# Altium PCB robotShield.PcbDoc
Units mil, origin at the board's own origin, x right, y up, seen from the top; angles counter-clockwise.
Board outline 3149.61 x 2362.2 mil, 2 copper layers (Top Layer, Bottom Layer); 66 components, 44 nets, 260 pads, 37 vias.
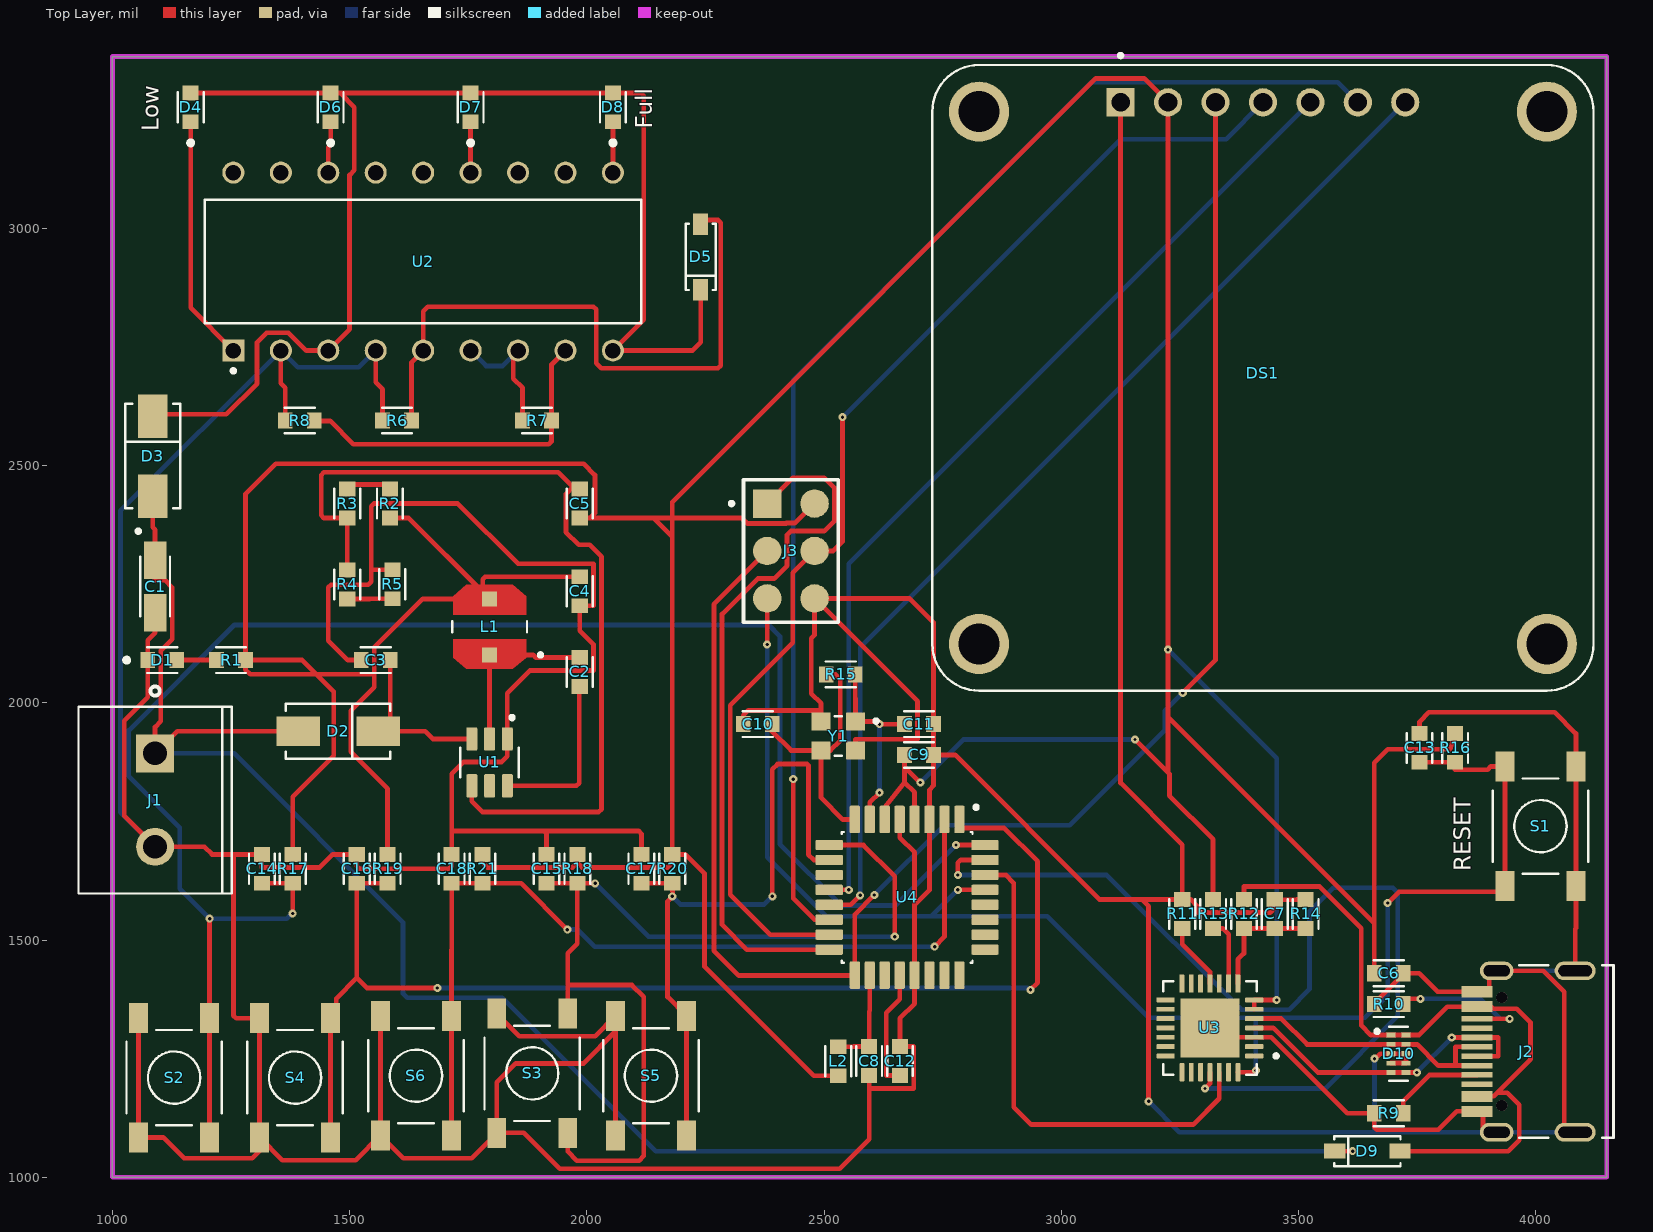
[diagram p0: Top Layer view]
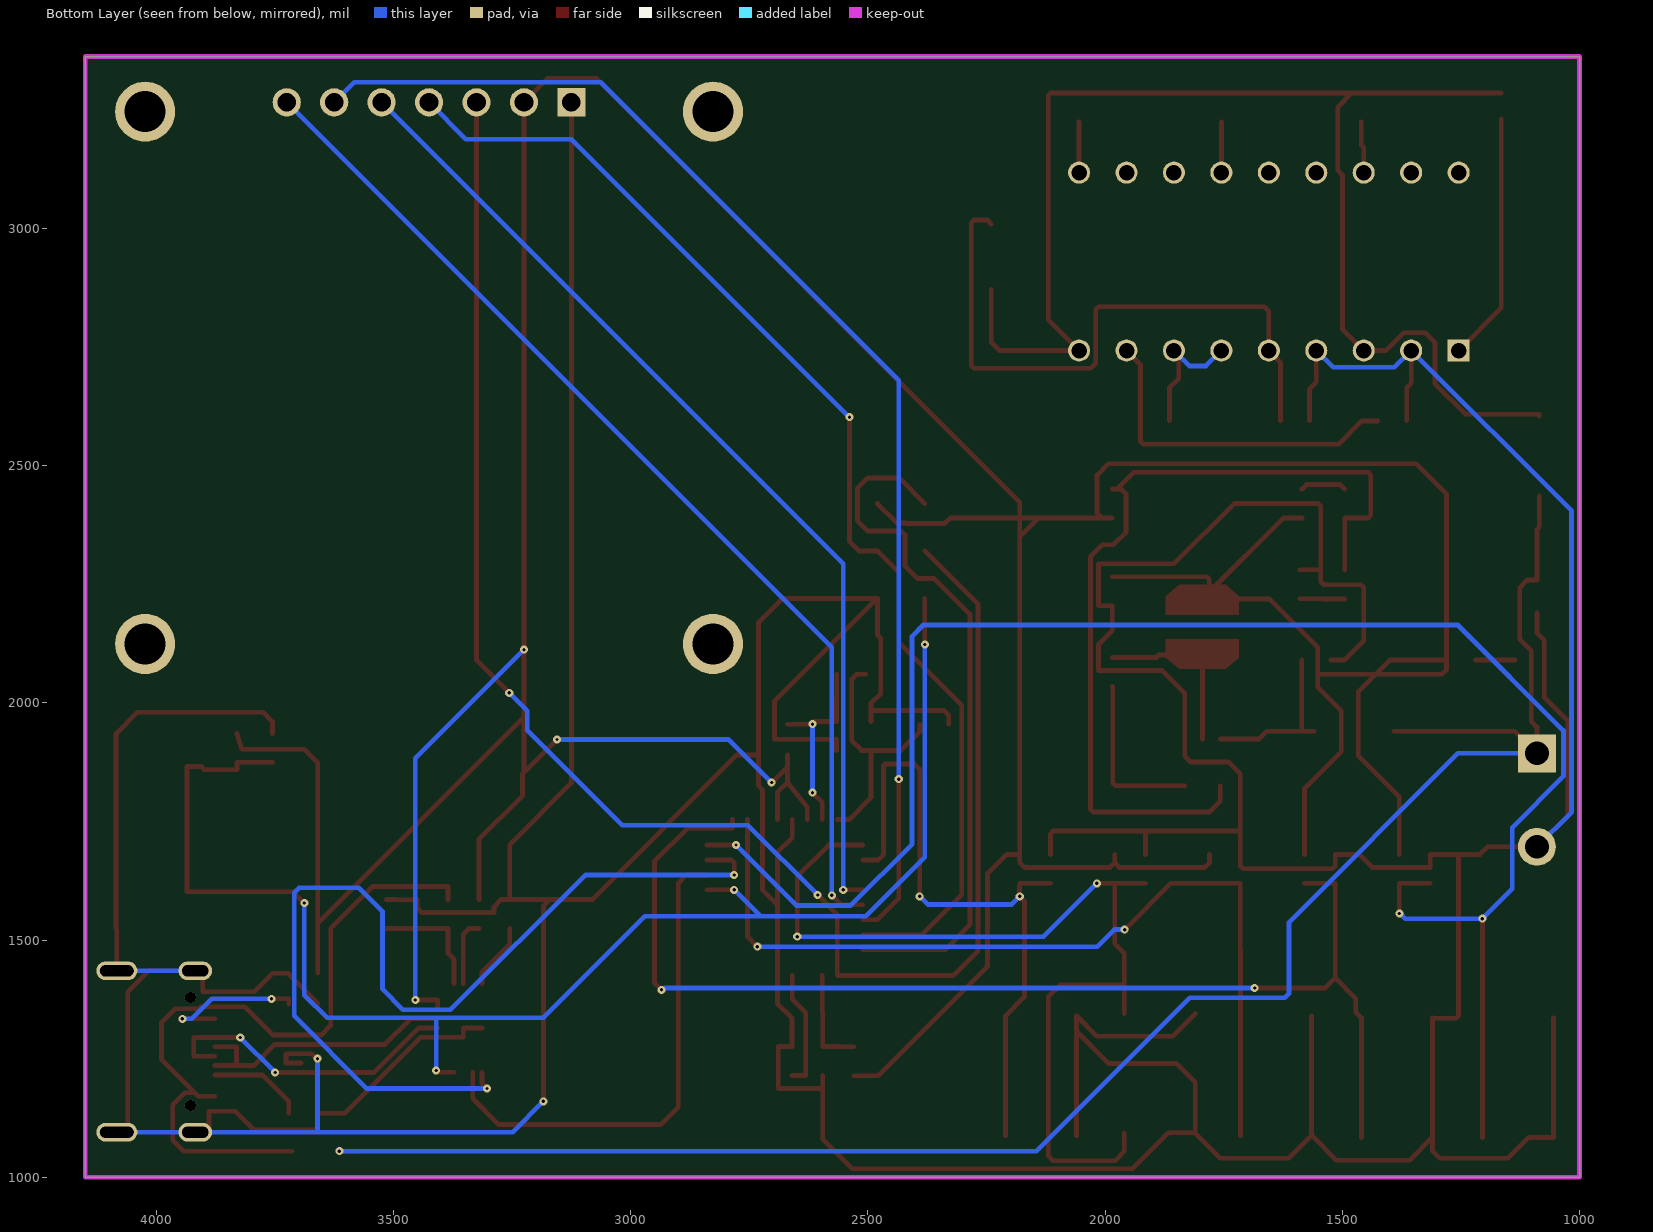
[diagram p1: Bottom Layer view, seen from below]
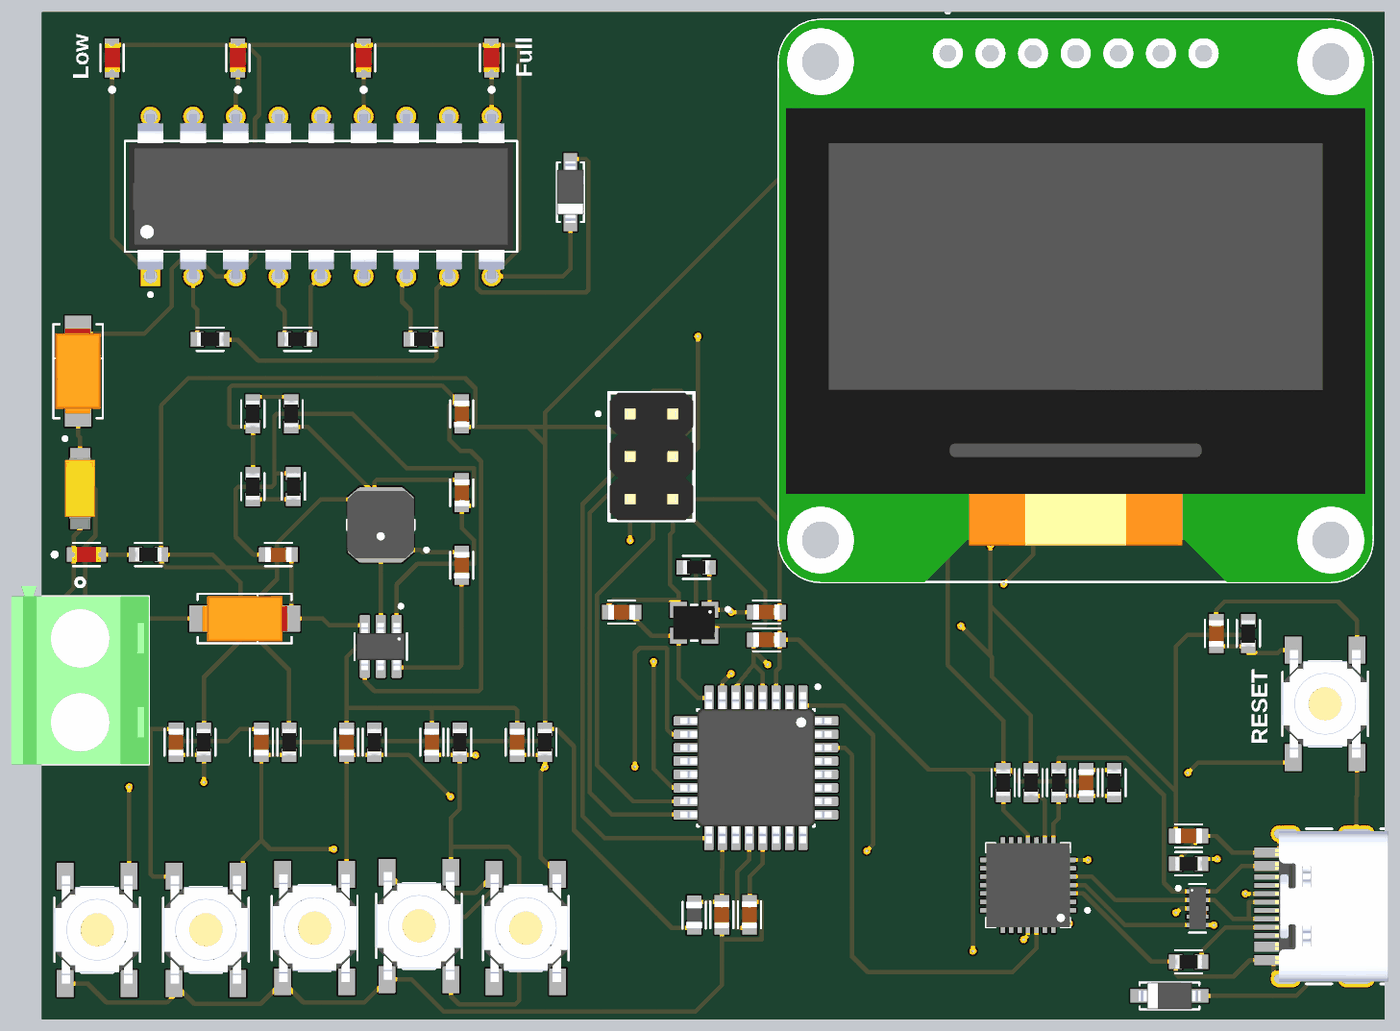
[diagram p2: 3D render of the assembled board from above, using the file's embedded part models]

## Layer stack, top to bottom
Top Solder: solder mask 0.4, Solder Resist, Dk 3.5
Top Layer: signal copper 1.4
Dielectric 1: dielectric 12.6, FR-4, Dk 4.8
Bottom Layer: signal copper 1.4
Bottom Solder: solder mask 0.4, Solder Resist, Dk 3.5

## Board outline
1000,1000 4149.61,1000 4149.61,3362.2 1000,3362.2

## Design rules (kind name [scope] priority, off if disabled: settings)
Clearance [All] p1: gap=7 ignorepadtopadclearanceinfootprint=FALSE
PolygonConnect [All] p1: connectstyle=Relief reliefconductorwidth=10 reliefentries=4 polygonreliefangle="90 Angle" airgapwidth=10
RoutingVias [All] p1: holewidth=7 width=17 viastyle="Through Hole" minholewidth=7 minwidth=14 maxholewidth=28 maxwidth=50
SolderMaskExpansion [All] p1: expansion=4 istentingtop=FALSE
SupplyNets "Schematic Supply Nets_3" [InNet('VCC')] p1: voltage=0.000
SupplyNets "Schematic Supply Nets_2" [InNet('5V')] p2: voltage=0.000
SupplyNets "Schematic Supply Nets_1" [InNet('GND')] p3: voltage=0.000
SupplyNets "Schematic Supply Nets" [InNet('VBUS')] p4: voltage=0.000
Width [All] p1: maxlimit=10 minlimit=10 preferedwidth=10
30 further rules are at their usual default settings.

## Classes and differential pairs
component class robotShield_USB: C6 C7 D9 D10 J2 R9 R10 R11 R12 R13 R14 U3
component class robotShield_Power: C1 C2 C3 C4 C5 D1 D2 D3 D4 D5 D6 D7 D8 J1 L1 R1 R2 R3 R4 R5 R6 R7 R8 U1 U2
component class robotShield_OLED: DS1
component class robotShield_CPU: C8 C9 C10 C11 C12 C13 J3 L2 R15 R16 S1 U4 Y1
component class robotShield_Buttom: C14 C15 C16 C17 C18 R17 R18 R19 R20 R21 S2 S3 S4 S5 S6

## Components (designator, comment, footprint, x,y, rotation, side; value= is the part's Value field where it differs from the comment)
C1 "10uF" TAJA 1090,2245 r90 top
C2 "100nF" CAP0603 1985,2065 r90 top
C3 "6.8uF" CAP0603 1555,2090 r180 top
C4 "47uF" CAP0603 1985,2235 r270 top
C5 "82pF" CAP0603 1985,2420 r90 top
C6 "10uF" CAP0603 3690,1430 r0 top
C7 "1uF" CAP0603 3450,1555 r90 top
C8 "0.1uF" CAP0603 2595,1245 r90 top
C9 "0.1uF" CAP0603 2700,1890 r0 top
C10 "22pF" CAP0603 2360,1955 r180 top
C11 "22pF" CAP0603 2700,1955 r0 top
C12 "0.1uF" CAP0603 2660,1245 r90 top
C13 "0.1uF" CAP0603 3755,1905 r90 top
C14 "0.1uF" CAP0603 1315,1650 r90 top
C15 "0.1uF" CAP0603 1915,1650 r90 top
C16 "0.1uF" CAP0603 1515,1650 r90 top
C17 "0.1uF" CAP0603 2115,1650 r90 top
C18 "0.1uF" CAP0603 1715,1650 r90 top
D1 "Power" LED0603 1105,2090 r0 top value=LED
D2 "Diode" SS36 1475.75,1940 r180 top
D3 "Diode" SS36 1085,2520 r270 top
D4 "Bat_LED_Green" LED0603 1165,3255 r90 top value=LED
D5 "11V-Zener" MBR0520LT3G 2240,2940 r90 top
D6 "Bat_LED_Y" LED0603 1460,3255 r90 top value=LED
D7 "Bat_LED_Y" LED0603 1755,3255 r90 top value=LED
D8 "Bat_LED_RED" LED0603 2055,3255 r90 top value=LED
D9 "Diode" MBR0520LT3G 3645,1055 r0 top
D10 "TVS" TVS-SE05T1D12GZ 3710.75,1260.32 r0 top
DS1 "OLED" OLD_SPI_1.3 3425,2685 r0 top
J1 "KF126-2P" KF126-2P 1090,1795 r270 top
J2 "USB Type C" USB_Type_C_16pin 4030,1265 r90 top
J3 "6Cnts-D" 6Cnts-D-SMD 2430,2320 r90 top
L1 "10uH" Inductor1515 1795,2160 r180 top
L2 "4.7uH" Inductor0603 2530,1244.5 r270 top
R1 "1.2K" RES0603 1250,2090 r0 top
R2 "100K" RES0603 1585,2420 r270 top
R3 "0R" RES0603 1495,2420 r90 top
R4 "0R" RES0603 1495,2249.5 r270 top
R5 "13.7K" RES0603 1590,2250 r90 top
R6 "330K" RES0603 1600,2595 r0 top
R7 "3.9K" RES0603 1895,2595 r180 top
R8 "8.2K" RES0603 1395,2595 r180 top
R9 "5.1K" RES0603 3690,1135 r0 top
R10 "5.1K" RES0603 3690,1365 r180 top
R11 "10K(NC)" RES0603 3255,1555 r270 top
R12 "22.1K" RES0603 3385,1555 r270 top
R13 "1K" RES0603 3320,1555 r90 top
R14 "22.1K" RES0603 3515,1555 r270 top
R15 "1M" RES0603 2535,2060 r180 top
R16 "10K" RES0603 3830,1905 r90 top
R17 "10K" RES0603 1380,1650 r90 top
R18 "10K" RES0603 1980,1650 r90 top
R19 "10K" RES0603 1580,1650 r90 top
R20 "10K" RES0603 2180,1650 r90 top
R21 "10K" RES0603 1780,1650 r90 top
S1 "SW1" Pushbutton_Tactile 4010,1740 r270 top
S2 "SW1" Pushbutton_Tactile 1130,1210 r90 top
S3 "SW1" Pushbutton_Tactile 1884.8,1219.02 r90 top
S4 "SW1" Pushbutton_Tactile 1385,1210 r90 top
S5 "SW1" Pushbutton_Tactile 2135.2,1214.02 r90 top
S6 "SW1" Pushbutton_Tactile 1639.8,1214.02 r90 top
U1 "TPS54302DDCR" TPS54302DDCR 1795,1874.41 r270 top
U2 "LM3914" LM3914N-1 1655,2930 r90 top
U3 "CP2102" CP2102 3313.31,1314.68 r180 top
U4 "ATMEGA328P-AU" ATMEGA328P-AU 2675,1590 r270 top
Y1 "16M" crystal-2520 2530,1930 r180 top

## Footprints (in the part's own frame and the unit in brackets; to place one, negate y for a bottom-side part, rotate by r counter-clockwise, add the part's x,y. Pads: shape width x height; smd on the part's side, far side on the other; paste and mask are expansions set on the pad)
6Cnts-D-SMD [mil] "6Cnts-D-SMD"
  rect 60x60 smd: 1(100,50)
  round 60 smd: 2(100,-50) 3(0,50) 4(0,-50) 5(-100,50) 6(-100,-50)
  silkscreen extent -150,-100 150,129, body extent -150,-98 150,98, height 416
ATMEGA328P-AU [mm] "QFP80P900X900X120-32N"
  rrect25% 1.47x0.55 smd: 1(-4.17,2.8) 2(-4.17,2) 3(-4.17,1.2) 4(-4.17,0.4) 5(-4.17,-0.4) 6(-4.17,-1.2) 7(-4.17,-2) 8(-4.17,-2.8) 17(4.17,-2.8) 18(4.17,-2) 19(4.17,-1.2) 20(4.17,-0.4) 21(4.17,0.4) 22(4.17,1.2) 23(4.17,2) 24(4.17,2.8)
  rrect25% 0.55x1.47 smd: 9(-2.8,-4.17) 10(-2,-4.17) 11(-1.2,-4.17) 12(-0.4,-4.17) 13(0.4,-4.17) 14(1.2,-4.17) 15(2,-4.17) 16(2.8,-4.17) 25(2.8,4.17) 26(2,4.17) 27(1.2,4.17) 28(0.4,4.17) 29(-0.4,4.17) 30(-1.2,4.17) 31(-2,4.17) 32(-2.8,4.17)
  silkscreen extent -4.92,-3.5 3.5,3.79, body extent -4.5,-4.5 4.5,4.5, height 1.2
CAP0603 [mil] "CAPC1608X50N"
  rect 31x34 smd: 1(-30.5,0) 2(30.5,0)
  silkscreen extent -31,-27 31,27, body extent -31,-18 31,18, height 33
CP2102 [mm] "QFN50P500X500X100-29N"
  rrect25% 0.97x0.26 smd: 1(-2.37,1.5) 2(-2.37,1) 3(-2.37,0.5) 4(-2.37,0) 5(-2.37,-0.5) 6(-2.37,-1) 7(-2.37,-1.5) 15(2.37,-1.5) 16(2.37,-1) 17(2.37,-0.5) 18(2.37,0) 19(2.37,0.5) 20(2.37,1) 21(2.37,1.5)
  rrect25% 0.26x0.97 smd: 8(-1.5,-2.37) 9(-1,-2.37) 10(-0.5,-2.37) 11(0,-2.37) 12(0.5,-2.37) 13(1,-2.37) 14(1.5,-2.37) 22(1.5,2.37) 23(1,2.37) 24(0.5,2.37) 25(0,2.37) 26(-0.5,2.37) 27(-1,2.37) 28(-1.5,2.37)
  rect 3.15x3.15 smd paste-0.575: 29(0,0)
  silkscreen extent -3.64,-2.5 2.5,2.5, body extent -2.5,-2.5 2.5,2.5, height 1
crystal-2520 [mm] "crystal-2520"
  rect 1x0.95 smd: 1(-0.925,-0.775) 2(0.925,-0.775) 3(0.925,0.775) 4(-0.925,0.775)
  silkscreen extent -2.12,-1.07 0.2,1.07, body extent -1.25,-1 1.25,1, height 0.8
Inductor0603 [mil] "InductorC1608X50N"
  rect 31x34 smd: 1(-30.5,0) 2(30.5,0)
  silkscreen extent -31,-27 31,27, body extent -31,-19 31,19, height 33
Inductor1515 [mm] "SMD Inductor 4.7uH 1.57A 4mm x 4mm x 2.8mm"
  rect 0.8x0.8 smd paste-1 mask+0: 1(0,1.5) 2(0,-1.5)
  Top Layer region: 1.95,-1.65 1.25,-2.25 -1.25,-2.25 -1.95,-1.65 -1.95,-0.65 1.95,-0.65
  Top Layer region: 1.95,1.65 1.95,0.65 -1.95,0.65 -1.95,1.65 -1.25,2.25 1.25,2.25
  silkscreen extent -2.83,-0.3 2,1.6, body extent -2,-2 2,2, height 2.8
KF126-2P [mil] "KF126-2P"
  rect 80x80 hole 50: 1(-98.43,0)
  round 80 hole 50: 2(98.43,0)
  silkscreen extent -240,-161 197,161, body extent -220,-161 197,161, height 394
LED0603 [mil] "LEDC1608X65N"
  rect 31x34 smd: A(30.5,0) C(-30.5,0)
  silkscreen extent -80,-27 31,27, body extent -33,-18 33,18, height 35
LM3914N-1 [mm] "DIP952W45P254L2336H533Q18"
  rect 1.18x1.18 / inner round 1.18 / far side rect 1.18x1.18 hole 0.83: 1(-4.763,10.16)
  round 1.18 hole 0.83: 2(-4.763,7.62) 3(-4.763,5.08) 4(-4.763,2.54) 5(-4.763,0) 6(-4.763,-2.54) 7(-4.763,-5.08) 8(-4.762,-7.62) 9(-4.762,-10.16) 10(4.763,-10.16) 11(4.763,-7.62) 12(4.763,-5.08) 13(4.763,-2.54) 14(4.763,0) 15(4.763,2.54) 16(4.763,5.08) 17(4.762,7.62) 18(4.762,10.16)
  silkscreen extent -5.95,-11.68 3.3,11.68, body extent -4.89,-11.43 4.89,11.43, height 5.33
MBR0520LT3G [mm] "SOD3716X135N"
  rect 1.15x0.8 smd: A(1.75,0) C(-1.75,0)
  silkscreen extent -1.78,-0.8 1.78,0.8, body extent -1.84,-0.8 1.84,0.8, height 1.35
OLD_SPI_1.3 [mm] "LCD_AOM12864A0-1.3BW-ANO"
  rect 1.508x1.508 / inner round 1.508 / far side rect 1.508x1.508 hole 1 mask+0.102: 1(-7.62,14.75)
  round 1.508 hole 1 mask+0.102: 2(-5.08,14.75) 3(-2.54,14.75) 4(0,14.75) 5(2.54,14.75) 6(5.08,14.75) 7(7.62,14.75)
  round 3.216 hole 2.2 mask+0.102: SH1(-15.2,14.25) SH2(15.2,14.25) SH3(-15.2,-14.25) SH4(15.2,-14.25)
  silkscreen extent -17.7,-16.75 17.7,17.35, body extent -17.7,-16.75 17.7,16.75, height 5
Pushbutton_Tactile [mm] "PTS525SMG15SMTR2LFS"
  rect 1.6x1 smd: 1(-3.2,1.9) 1(3.2,1.9) 2(-3.2,-1.9) 2(3.2,-1.9)
  silkscreen extent -2.55,-2.55 2.55,2.55, body extent -3.2,-2.55 3.2,2.55, height 1.6
RES0603 [mil] "RESC1608X50N"
  rect 31x34 smd: 1(-30.5,0) 2(30.5,0)
  silkscreen extent -31,-27 31,27, body extent -31,-16 31,16, height 18
SS36 [mm] "DO-214AC (SMA)"
  rect 2.33x1.56 smd: A(2.14,0) C(-2.14,0)
  silkscreen extent -2.8,-1.47 2.8,1.47, body extent -2.54,-1.34 2.51,1.36, height 2.17
TAJA [mm]
  rect 2x1.2 smd: NEG(-1.4,0) POS(1.4,0)
  silkscreen extent -1.6,-0.8 3.07,1, body extent -2.39,-0.9 2.41,0.9, height 1.8
TPS54302DDCR [mm] "SOT95P280X110-6N"
  rrect25% 1.25x0.59 smd: 1(-1.255,0.95) 2(-1.255,0) 3(-1.255,-0.95) 4(1.255,-0.95) 5(1.255,0) 6(1.255,0.95)
  silkscreen extent -2.5,-1.56 0.8,1.56, body extent -1.4,-1.45 1.4,1.45, height 1.1
TVS-SE05T1D12GZ [mm] "DFN2510"
  rect 0.5x0.25 smd: 1(-0.4,1) 1(0.4,1) 2(-0.4,0.5) 2(0.4,0.5) 4(-0.4,-0.5) 4(0.4,-0.5) 5(-0.4,-1) 5(0.4,-1)
  rect 0.5x0.279 smd: 3(-0.4,0) 3(0.4,0)
  silkscreen extent -1.25,-1.44 0.5,1.44, body extent -0.5,-1.25 0.5,1.25, height 0.55
USB_Type_C_16pin [mm] "USB Type C - Connector, Top-mount SMT, 16pos"
  round 0.6 hole 0.6: 41(-2.89,2.58) 42(2.89,2.58)
  rect 0.59x1.65 smd mask+0.064: A1B12(-3.2,3.9) A4B9(-2.4,3.9) B1A12(3.2,3.9) B4A9(2.4,3.9)
  rect 0.298x1.65 smd mask+0.064: A5(-1.25,3.9) A6(-0.25,3.9) A7(0.25,3.9) A8(1.25,3.9) B5(1.75,3.9) B6(0.75,3.9) B7(-0.75,3.9) B8(-1.75,3.9)
  oval 1x2.2 hole 0.6 slot 1.8 at 90 deg mask+0.064: SH1(-4.32,-1.35) SH2(4.32,-1.35)
  oval 1x1.8 hole 0.6 slot 1.4 at 90 deg mask+0.064: SH3(-4.32,2.85) SH4(4.32,2.85)
  silkscreen extent -4.62,-3.4 4.62,1.63, body extent -4.47,-3.25 4.47,3.5, height 3.24

## Part data
C1: library part CapacitorP, "Cap Tant Solid SMD 3216-18 3 Ohm 125Â°C T/R", Package="1206 AVX", Availability=Unavailable, MF=AVX, MP=TAJA106K010YNJ, Price=None, SnapEDA_Link=https://www.snapeda.com/parts/TAJA106K010YNJ/AVX/view-part/1683849/?ref=snap
C2 C3 C4 C5 C6 C7 C8 C9 C10 C11 C12 C13 C14 C15 C16 C17 C18: library part Capacitor, "CAP SMD", Package="0603 AVX", Availability=Unavailable, MF=AVX, MP=LD031A101GAB2A, Price=None, SnapEDA_Link=https://www.snapeda.com/parts/LD031A101GAB2A/AVX/view-part/1973966/?ref=snap
D1 D4 D6 D7 D8: library part LED, "LED", Package=None, Availability=Unavailable, MP=LTW-C191TLA, Price=None
D2 D3 D5 D9: library part "Schottky Diode", "Schottky Diode", Package="DO-214AC-2 Diotec", Availability="In Stock", Check_prices=https://www.snapeda.com/parts/S1M/Diotec/view-part/?ref=eda, MF="Diotec Semiconductor", MP=S1M, Price=None, Purchase-URL=https://pricing.snapeda.com/search/part/S1M/?ref=eda, SnapEDA_Link=https://www.snapeda.com/parts/S1M/Diotec/view-part/?ref=snap
D10: library part TVS_SE05NRC14GT, "ESD8104MUTAG, Quad Uni-Directional ESD Protection Diode, 10-Pin UDFN", Package="UDFN-10 ON Semiconductor", Availability=Unavailable, DigiKey-Purchase-URL=https://snapeda.com/shop?store=DigiKey&id=220668, MF="ON Semiconductor", MP=ESD8104MUTAG, Price=None, SnapEDA_Link=https://www.snapeda.com/parts/ESD8104MUTAG/ON%20Semiconductor/view-part/220668/?ref=snap
DS1: "Non-Touch Graphic LCD Display Module - Blue OLED SPI 1.3 (33.02mm) 128 x 64", Package=None, Check_prices=https://www.snapeda.com/parts/AOM12864A0-1.3BW-ANO/Orient+Display/view-part/?ref=eda, MF="Orient Display", MP=AOM12864A0-1.3BW-ANO, SnapEDA_Link=https://www.snapeda.com/parts/AOM12864A0-1.3BW-ANO/Orient+Display/view-part/?ref=snap
J1: "Terminal Block Connector Wire Receptacle 2 5 mm 30-16 AWG Green 13.5 A 300 V", Package=None, Check_prices=https://www.snapeda.com/parts/282836-2/TE+Connectivity+AMP+Connectors/view-part/?ref=eda, MF="TE Connectivity", MP=282836-2, SnapEDA_Link=https://www.snapeda.com/parts/282836-2/TE+Connectivity+AMP+Connectors/view-part/?ref=snap
J2: library part "USB_Type_C _16pin", "USB Type C - Connector, Top-mount SMT, 16pos", Package=None, Check_prices=https://www.snapeda.com/parts/217179-0001/Molex/view-part/?ref=eda, ComponentLink1Description=link, ComponentLink1URL=https://roboeq.ir/products/detail/1501044/کانکتور-USB-Type-C-مادگی-16-پین-SMD/, MF=Molex, MP=217179-0001, SnapEDA_Link=https://www.snapeda.com/parts/217179-0001/Molex/view-part/?ref=snap
J3: Package=None, Availability=Unavailable, MP=MTSW-103-22-S-D-430, Price=None
L1 L2: library part Inductor, "Inductor with Inductance 6.8uH Tol.+/-20%", Package=None, Availability=Unavailable, MP=LQM18DN6R8M70B, Price=None
R1 R2 R3 R4 R5 R6 R7 R8 R9 R10 R11 R12 R13 R14 R15 R16 R17 R18 R19 R20 R21: library part Resistor, "RES 0.27 OHM 1% 1/10W", Package=0603, Power_Rating=".1 W", Resistance=27, Tolerance=1%, Availability="In Stock", Check_prices=https://www.snapeda.com/parts/3-1879460-5/TE+Connectivity/view-part/?ref=eda, EU_RoHS_Compliance="Compliant with Exemptions", MF="TE Connectivity", MP=3-1879460-5, Price=None, SnapEDA_Link=https://www.snapeda.com/parts/3-1879460-5/TE+Connectivity/view-part/?ref=snap
S1 S2 S3 S4 S5 S6: library part Pushbutton, "Switch,Pushbutton,Tactile,SPST"
U1: "4.5-V to 28-V Input, 3-A Output, EMI Friendly Synchronous Step-Down Converter", Package="SOT-23-THN-6 Texas Instruments", Availability="In Stock", Check_prices=https://www.snapeda.com/parts/TPS54302DDCR/Texas+Instruments/view-part/?ref=eda, MF="Texas Instruments", MP=TPS54302DDCR, Price=None, Purchase-URL=https://pricing.snapeda.com/search?q=TPS54302DDCR&ref=eda, SnapEDA_Link=https://www.snapeda.com/parts/TPS54302DDCR/Texas+Instruments/view-part/?ref=snap
U2: library part LM3914N-1, "LED, LCD, Vacuum Fluorescent (VF) Driver 18-PDIP", Package="PDIP-18 Texas Instruments", Check_prices=https://www.snapeda.com/parts/LM3914N-1/NOPB/Texas+Instruments/view-part/?ref=eda, MF="Texas Instruments", MP=LM3914N-1/NOPB, SnapEDA_Link=https://www.snapeda.com/parts/LM3914N-1/NOPB/Texas+Instruments/view-part/?ref=snap
U3: "CP2102N USB 2.0 to UART (RS232) Bridge Interface Evaluation Board", Package="WFQFN-20 Silicon Labs", Availability="In Stock", Check_prices=https://www.snapeda.com/parts/CP2102/Silicon+Labs/view-part/?ref=eda, MF="Silicon Labs", MP=CP2102, Price=None, Purchase-URL=https://pricing.snapeda.com/search/part/CP2102/?ref=eda, SnapEDA_Link=https://www.snapeda.com/parts/CP2102/Silicon+Labs/view-part/?ref=snap
U4: "AVR ATmega Microcontroller IC 8-Bit 20MHz 32KB (16K x 16) FLASH 32-TQFP (7x7)", Package="TQFP-32 Microchip", Check_prices=https://www.snapeda.com/parts/ATMEGA328P-AU/Microchip/view-part/?ref=eda, MF=Microchip, MP=ATMEGA328P-AU, SnapEDA_Link=https://www.snapeda.com/parts/ATMEGA328P-AU/Microchip/view-part/?ref=snap
Y1: library part crystal-4P, "40MHz 10pF ±10ppm SMD-4P Crystals", Package="SMD-4 EPSON", Check_prices=https://www.snapeda.com/parts/TSX-3225%2016.0000MF18X-AC3/EPSON/view-part/?ref=eda, MF=EPSON, MP="TSX-3225 16.0000MF18X-AC3", SnapEDA_Link=https://www.snapeda.com/parts/TSX-3225%2016.0000MF18X-AC3/EPSON/view-part/?ref=snap

## Via types
v1: diameter 17, hole 7, Top Layer to Bottom Layer, 37 vias

## Nets (pads, with @x,y where several pads share a name; then routed paths per layer and width w, separated by ;. In a path a pad name is that pad's centre, name@x,y a point inside that pad or via, vN(x,y) a via of type N, cw(c..) or ccw(c..) an arc to the next point about the centre after c; other vN are vias at no path point)
5V: C4.1 C5.1 C6.1 C9.1 DS1.2 J3.2 L1.2 L2.2 R1.2 R2.2 R13.2 R16.2 R17.2 R18.2 R19.2 R20.2 R21.2 U3.6 U3.7 U4.4 U4.6 | length 12030.2
  Top Layer w10: R17.2 1380,1802 1466.36,1888.36 1466.36,2023.64 1430,2060 ; R19.2 1580,1819.13 1502.13,1897 1502.13,1983 1552,2032.87 1552,2060 ; R2.2 1624.56,2389.5 L1.2@1780.5,2233.56 ; R21.2 1780,1663 1790,1653 1970,1653 1980,1663 ; R18.2 1980,1663 ; C4.1 1785.42,2265.5 1780.5,2260.58 L1.2@1780.5,2233.56 ; C5.1 2006.5,2389.5 ; J3.2 2439,2379 2421,2379 2420,2378 2338,2378 2326.5,2389.5 2180,2389.5 ; L2.2 2478,1214 2248,1444 2248,1640 2207.5,1680.5 R20.2 ; U4.6 2627.76,1780 2669.5,1832.25 ; C9.1 2669.5,1865.5 ; U4.4 2690.75,1811 2669.5,1832.25 ; v1(2703,1832) 2669.5,1865.5 ; v1(3155.5,1922.5) 3225,1853 ; R13.2 3320,1712 3228,1804 3228,1850 3225,1853 ; U3.6 U3.7 v1(3454,1373.74) ; C6.1 3659.5,1535.3 ; R16.2 3820,1902 3688,1902 3659.5,1873.5 3659.5,1535.3 ; R1.2 1280.5,2070 1290.5,2060 1430,2060 ; R1.2 1280.5,2440 1344.5,2504 1993,2504 2017,2480 2017,2400 2006.5,2389.5 ; R1.2 1400,2090 1430,2060 ; 1430,2060 1552,2060 ; 1552,2060 1552,2117 1654.06,2219.06 L1.2 L1.2@1780.5,2233.56 ; 1980,1663 1990,1653 2170,1653 2180,1663 R20.2 ; 2006.5,2389.5 2141,2389.5 ; 2141,2389.5 2180,2389.5 ; 2141,2389.5 2180,2350.5 ; R20.2 2180,2350.5 ; 2180,2350.5 2180,2389.5 ; 2180,2389.5 2180,2423 3073,3316 3174.71,3316 DS1.2 v1(3225,2112) 3225,1969.8 ; 2669.5,1832.25 2669.5,1865.5 ; 3225,1853 3225,1969.8 ; 3225,1969.8 3659.5,1535.3
  Bottom Layer w10: v1(2703,1832) 2793.5,1922.5 v1(3155.5,1922.5) ; v1(3225,2112) 3454,1883 v1(3454,1373.74)
AREF: C12.1 U4.20 | length 252
  Top Layer w10: U4.20 2659.25,1375 2631,1346.75 2631,1214.5 C12.1
CS_LCD: DS1.7 U4.13 | length 2220.8
  Top Layer w10: U4.13 2556,1574.25 v1(2576,1594.25)
  Bottom Layer w10: v1(2576,1594.25) 2576,2116.71 DS1.7
D0/RXD: U3.26 U4.30 | length 1066.4
  Top Layer w10: U4.30 2882.76,1637.24 2900,1620 2900,1148 2937,1111 3277.99,1111 3332.99,1166 U3.26
D1/TXD: U3.25 U4.31 | length 2104.8
  Top Layer w10: v1(2782,1637) 2782,1662.88 2787.86,1668.74 U4.31 ; v1(3303,1187) 3313.31,1197.31 U3.25
  Bottom Layer w10: v1(2782,1637) 3096,1637 3380,1353 3480,1353 3523,1396 3523,1560 3573,1610 3699,1610 3709,1600 3709,1340 3556,1187 v1(3303,1187)
D2: C14.1 R17.1 S2.2 U4.32 | length 3687.8
  Top Layer w10: S2.2@1204.8,1084.02 1204.8,1210 1204.8,1544.8 v1(1205,1545) ; C14.1 R17.1 v1(1380,1556) ; v1(2778,1700.24) U4.32
  Bottom Layer w10: v1(1380,1556) 1378.11,1556 1367.11,1545 v1(1205,1545) 1142,1608 1142,1737 1034,1845 1034,1941.43 1256.57,2164 2383,2164 2407,2140 2407,1702 2536,1573 2650.76,1573 v1(2778,1700.24)
  other v1: 1205,1545
D3: C16.1 R19.1 S4.2 U4.1 | length 2542.8
  Top Layer w10: S4.2@1459.8,1084.02 1459.8,1335.98 1471.59,1347.77 1471.59,1376.59 1515,1420 ; R19.1 C16.1 1515,1420 ; v1(1685,1399) 1536,1399 1515,1420 ; U4.1 2785.24,1736 2880,1736 2950,1666 2950,1410 v1(2935,1395)
  Bottom Layer w10: v1(1685,1399) 2929.11,1399 2933.11,1395 v1(2935,1395)
D4: C18.1 R21.1 S6.2 U4.2 | length 1881.7
  Top Layer w10: S6.2@1714.61,1088.03 1714.61,1340 1714.61,1479 1715,1479.39 C18.1 R21.1 1861.5,1619.5 v1(1959,1522) ; v1(2733,1486) 2753.74,1506.74 U4.2
  Bottom Layer w10: v1(1959,1522) 1980.57,1522 2016.57,1486 v1(2733,1486)
D5: C15.1 R18.1 S3.2 U4.9 | length 2073.3
  Top Layer w10: C15.1 R18.1 ; S3.2@1959.61,1093.03 1959.61,1054.39 1979,1035 2110,1035 2120,1045 2120,1380 2095,1405 1959.61,1405 ; S3.2@1959.61,1345 1959.61,1405 ; v1(2017.5,1619.5) R18.1 ; U4.9 2583,1700.24 2649,1634.24 v1(2649,1507) ; 1959.61,1405 1959.61,1472 1980,1492.39 R18.1
  Bottom Layer w10: v1(2017.5,1619.5) 2130,1507 v1(2649,1507)
D6: C17.1 R20.1 S5.2 U4.10 | length 1428.2
  Top Layer w10: C17.1 R20.1 2180.38,1609 v1@2180.97,1592.38 ; v1(2180,1592) 2170,1582 2170,1380 2210,1340 S5.2@2210,1088.03 ; v1(2391,1592) 2391,1860 2402,1871 2464,1871 2467,1868 2467,1680 2478.26,1668.74 U4.10
  Bottom Layer w10: v1(2180,1592) 2197,1575 2374,1575 v1(2391,1592)
D8: DS1.5 U4.12 | length 2104.2
  Top Layer w10: U4.12 v1(2552,1605.75)
  Bottom Layer w10: v1(2552,1605.75) 2552,2292.71 DS1.5
D10: DS1.6 U4.14 | length 2654.4
  Top Layer w10: v1(2435,1839) 2435,1587.76 2480,1542.76 U4.14
  Bottom Layer w10: v1(2435,1839) 2435,2680 3063,3308 3582.71,3308 DS1.6
D11/MOSI: DS1.4 J3.4 U4.15 | length 2531.9
  Top Layer w10: U4.15 2386.7,1511.26 2302,1595.96 2302,1994.79 2434,2126.79 2434,2274 J3.4 2519,2320 2539,2340 v1(2539,2602)
  Bottom Layer w10: v1(2539,2602) 3125,3188 3347.29,3188 DS1.4
D12/MISO: J3.1 U4.16 | length 1500.5
  Top Layer w10: J3.1 2434,2474 2500,2474 2522,2452 2522,2384 2500,2362 2430,2362 2422,2354 2422,2289 2395,2262 2360,2262 2285,2187 2285,1532.28 2337.52,1479.76 U4.16
D13/SCK: DS1.3 J3.3 U4.17 | length 3518.2
  Top Layer w10: J3.3 2268,2208 2268,1477.5 2320.5,1425 2564.76,1425 U4.17 2564.76,1553.76 v1(2606,1595) ; v1(3256,2021) 3325,2090 DS1.3
  Bottom Layer w10: v1(2606,1595) 2753,1742 3017.88,1742 3218.21,1942.33 3218.21,1983.21 v1(3256,2021)
DTR: C13.1 J3.5 R16.1 S1.2 U3.28 U4.29 | length 3213.4
  Top Layer w10: v1(2380,2123) J3.5 ; v1(2782,1605.75) U4.29 ; U3.28 3404.48,1221.38 3408.11,1225 v1(3410,1225) ; v1(3688,1578) 3712,1602 3935.2,1602 3935.2,1614.02 3935.2,1865.98 3905.68,1865.98 3898.52,1858.82 3830,1858.82 R16.1 C13.1
  Bottom Layer w10: v1(2380,2123) 2380,1675 2505,1550 2726.25,1550 ; v1(2782,1605.75) 2726.25,1550 ; v1(3410,1225) 3410,1336 ; v1(3688,1578) 3688,1384 3640,1336 3410,1336 ; 2726.25,1550 2970,1550 3184,1336 3410,1336
GND: C1.NEG C3.2 C4.2 C6.2 C7.2 C8.1 C9.2 C10.2 C11.2 C12.2 C13.2 C14.2 C15.2 C16.2 C17.2 C18.2 D1.C D10.3 D10.4 DS1.1 J1.2 J2.A1B12 J2.B1A12 J2.SH1 J2.SH2 J2.SH3 J2.SH4 J3.6 R5.2 R6.1 R8.2 R9.1 R10.2 R11.1 R14.1 S1.1 S2.1 S3.1 S4.1 S5.1 S6.1 U1.1 U2.2 U2.4 U3.3 U3.29 U4.3 U4.5 U4.21 Y1.2 Y1.4 | length 19002.3
  Top Layer w10: S2.1@1055.2,1335.98 1055.2,1084.02 1107,1084.02 1151.02,1040 1294.75,1040 1310.2,1055.45 S4.1@1310.2,1084.02 ; C1.NEG 1090,2147.5 1074.5,2132 D1.C 1074.5,2011.5 1025,1962 1025,1761.57 J1.2 1194,1696.57 1210.07,1680.5 1255,1680.5 ; S4.1@1310.2,1335.98 S4.1@1310.2,1335 ; U2.2 1355,2673.5 1364.5,2664 R8.2 ; C3.2 1496,2090 1455,2131 1455,2243.14 1460.86,2249 1539,2249 1545.57,2255.57 1545.57,2280.43 1545.5,2280.5 ; U2.4 1555,2675.5 1569.5,2661 R6.1 ; S6.1@1565,1340 S6.1@1565,1088.03 ; R5.2 1549.72,2280.5 1545.5,2280.5 ; S3.1@1810,1345 1858,1297 2017.39,1297 2060.39,1340 2060.39,1307.39 ; C15.2 1915,1724.14 1909.14,1730 ; S5.1@2060.39,1088.03 2060.39,1307.39 ; C17.2 2115,1724.14 2109.14,1730 1909.14,1730 ; C10.2 2329.5,1973.5 2340,1984 2493.58,1984 ; Y1.2 2493.58,1984 ; Y1.4 2566.42,1923 2697,1923 2697,2003 J3.6 ; C8.1 2595,1187 ; U4.5 2659.25,1716 2690.75,1684.5 2690.75,1574 ; DS1.1 3125,1831 3255,1701 R11.1 ; v1(3184,1160) 3184,1571 3169.5,1585.5 ; U3.29 3353,1314.69 3353,1295 U3.3 3442.64,1295 3602.64,1135 R9.1 3659.5,1105.86 3665.36,1100 3794.98,1100 3834,1139.02 J2.A1B12 3889,1139.02 3889,1094.92 J2.SH3 ; C7.2 C7.2@3450,1585.03 ; R14.1 3496.71,1585.5 3496.24,1585.03 C7.2@3450,1585.03 ; R10.2 3659.5,1367 3720.5,1428 C6.2 3754,1430 3793.02,1390.98 J2.B1A12 3902,1390.98 3902,1435.08 J2.SH4 4016,1435.08 4060,1391.08 4060,1094.92 J2.SH1 ; v1(3660,1250) 3661.89,1250 3672.21,1260.32 3726.98,1260.32 3726.5,1259.83 D10.4@3726.5,1240.63 ; D10.4@3695,1240.63 D10.4@3726.5,1240.63 ; D10.3@3726.5,1260.32 D10.4@3726.5,1240.63 ; C13.2 3755,1960 3775,1980 4040,1980 4084.8,1935.2 4084.8,1865.98 4084.8,1614.02 4084.8,1524.65 4083.15,1523 J2.SH2 ; 1255,1680.5 C14.2 1315,1653 1437,1653 1464.5,1680.5 C16.2 1515,1655.86 1520.86,1650 1709.14,1650 1715,1655.86 1715,1730 ; 1255,1680.5 1255,1340.86 1260.86,1335 S4.1@1310.2,1335 ; S4.1@1310.2,1084.02 S4.1@1310.2,1335 ; S4.1@1310.2,1084.02 1358.21,1036 1512.97,1036 S6.1@1565,1088.03 ; 1545.5,2280.5 1545.5,2414.14 1551.36,2420 1728,2420 1855,2293 2014,2293 2014,2204.5 C4.2 1985,2152 2014,2123 2014,2068 1880,2068 1832.4,2020.4 U1.1 1832.4,1887.4 1820,1875 1740,1875 1715,1850 1715,1730 ; S6.1@1565,1088.03 1613.03,1040 1756.97,1040 1810,1093.03 S3.1@1810,1094 ; 1715,1730 1909.14,1730 ; S3.1@1810,1094 1867,1094 1943,1018 2533,1018 2595,1080 2595,1187 ; S3.1@1810,1094 1810,1200 1850,1240 1993,1240 2060.39,1307.39 ; J3.6 2680,2220 2730.5,2169.5 C11.2 C9.2 ; J3.6 2480,2143 2473,2136 2473,2019.58 2493.58,1999 2493.58,1984 ; 2595,1187 2689,1187 2689,1275.5 C12.2 2660,1335 2690.75,1365.75 U4.21 2690.75,1574 ; 2690.75,1574 2722.24,1605.5 U4.3 2722.24,1817 2730.5,1825.26 C9.2 ; C9.2 2776,1890 3080.5,1585.5 3169.5,1585.5 ; 3169.5,1585.5 R11.1 ; R11.1 3272.5,1585.5 3288,1570 3288,1558 3440,1558 3450,1568 C7.2@3450,1585.03
  Bottom Layer w10: J1.2 1017,1769.57 1017,2404.5 U2.2 1390.5,2707 1519.5,2707 U2.4 ; v1(3184,1160) 3249.08,1094.92 3660,1094.92 ; v1(3660,1250) 3660,1094.92 ; J2.SH4 J2.SH2 ; J2.SH1 J2.SH3 3660,1094.92
NetC2_1: C2.1 U1.6 | length 358.1
  Top Layer w10: U1.6 1978.14,1825 1984,1830.86 1984,2033.5 C2.1
NetC2_2: C2.2 L1.1 U1.2 | length 369.4
  Top Layer w10: U1.2 L1.1 1887,2100.94 1892.44,2095.5 C2.2
NetC3_1: C3.1 D2.C U1.3 | length 354.3
  Top Layer w10: D2.C D2.C@1585.5,1940 ; C3.1 D2.C@1585.5,1940 ; U1.3 1675.18,1923.82 1659,1940 D2.C@1585.5,1940
NetC5_2: C5.2 R3.1 R4.1 U1.4 | length 1863.8
  Top Layer w10: R4.1 R3.1 1445.86,2389.5 1440,2395.36 1440,2480.14 1445.86,2486 1939.81,2486 C5.2@1975.31,2450.5 ; U1.4 1757.6,1792.4 1780,1770 2025,1770 2031,1776 2031,2307.94 2005.7,2333.24 1982.76,2333.24 1956,2360 1956,2440 1966.5,2450.5 C5.2@1975.31,2450.5 ; C5.2 C5.2@1975.31,2450.5
NetC7_1: C7.1 R12.2 R14.2 U3.8 | length 251.7
  Top Layer w10: U3.8 3372.36,1459 3385,1471.64 R12.2 C7.1 R14.2
NetC8_2: C8.2 L2.1 U4.18 | length 216.1
  Top Layer w10: L2.1 2562,1275 2562.5,1275.5 C8.2 2595,1350 2596.26,1351.26 U4.18
NetC10_1: C10.1 R15.2 U4.8 Y1.3 | length 537.6
  Top Layer w10: C10.1 2390.5,1939.5 2430.51,1899.49 Y1.3 ; R15.2 2524,2060 2534,2050 2534,1920 2513.49,1899.49 Y1.3 ; U4.8 2564.76,1754 2539.58,1754 2493.58,1800 Y1.3
NetC11_1: C11.1 R15.1 U4.7 Y1.1 | length 418.2
  Top Layer w10: R15.1 2565.5,2009.92 2566.42,2009 Y1.1 2615,1960.51 v1@2620.51,1955 ; U4.7 2596.26,1790 v1(2617,1810.74) ; v1(2617,1955) v1@2620.51,1955 ; C11.1 v1@2620.51,1955
  Bottom Layer w10: v1(2617,1810.74) v1(2617,1955)
NetD1_A: D1.A R1.1 | length 84
  Top Layer w10: D1.A R1.1
NetD3_C: D3.C D4.A D5.C D6.A D7.A D8.A U2.3 U2.9 | length 2911.2
  Top Layer w10: D3.C 1085,2608 1240,2608 1305,2673 1305,2760 1325,2780 1371,2780 1408.5,2742.5 U2.3 1500,2787.5 1500,3112.32 1510,3122.32 1510,3255.5 1480,3285.5 ; D4.A D6.A ; D6.A@1463.37,3285.5 1480,3285.5 ; D5.C 2240,2760 2222.5,2742.5 U2.9 2120,2807.5 2120,3279.64 2114.14,3285.5 D8.A D7.A 1480,3285.5
NetD4_C: D4.C U2.1 | length 525.2
  Top Layer w10: D4.C@1165,3230.43 1165,2832.5 U2.1
NetD5_A: D5.A R6.2 U2.5 | length 1343.4
  Top Layer w10: R6.2 1630.5,2718 U2.5 1655,2825 1665,2835 2013.91,2835 2019.77,2829.14 2019.77,2716.09 2030.86,2705 2276.32,2705 2282.18,2710.86 2282.18,3011.96 2276.32,3017.82 2248.92,3017.82 D5.A
NetD6_C: D6.C U2.16 | length 109.1
  Top Layer w10: U2.16 1455,3170.5 1460,3175.5 D6.C
NetD7_C: D7.C U2.13 | length 107
  Top Layer w10: U2.13 D7.C
NetD8_C: D8.C U2.10 | length 107
  Top Layer w10: U2.10 D8.C
NetJ2_A5: J2.A5 R9.2 | length 204.1
  Top Layer w10: R9.2 3720.5,1160 3776.29,1215.79 J2.A5
NetJ2_B5: J2.B5 R10.1 | length 321.5
  Top Layer w10: R10.1 3720.5,1376 v1(3757,1376) ; J2.B5 v1(3945,1333.9)
  Bottom Layer w10: v1(3757,1376) 3882.9,1376 3925,1333.9 v1(3945,1333.9)
NetR2_1: R2.1 R3.2 | length 97.9
  Top Layer w10: R3.2 1504.5,2460 1575.5,2460 R2.1
NetR4_2: R4.2 R5.1 | length 95.2
  Top Layer w10: R4.2 1542,2219 1542.5,2219.5 R5.1
NetR7_1: R7.1 R8.1 U2.8 | length 727.6
  Top Layer w10: R8.1 1425.5,2594 1459,2594 1508,2545 1919.64,2545 1925.5,2550.86 R7.1 1925.5,2713 U2.8
NetR7_2: R7.2 U2.6 U2.7 | length 286.6
  Top Layer w10: U2.7 1855,2732.63 1845,2722.63 1845,2683.5 1864.5,2664 R7.2
  Bottom Layer w10: U2.6 1787.5,2710 1822.5,2710 U2.7
NetR11_2: R11.2 U3.11 | length 140.7
  Top Layer w10: R11.2 3255,1491 3313.31,1432.69 U3.11
NetR13_1: R13.1 U3.9 | length 141.8
  Top Layer w10: R13.1 3340,1524.5 3352.68,1511.82 U3.9
USB_DN: D10.2 J2.A7 J2.B7 U3.5 | length 595.6
  Top Layer w10: U3.5 3463.63,1334.37 3518,1280 3726.5,1280 3750,1280 3794.53,1235.47 3831,1235.47 ; J2.B7 3831,1235.47 ; J2.A7 3831,1274.84 3831,1235.47
USB_DP: D10.5 J2.A6 J2.B6 U3.4 | length 667.6
  Top Layer w10: U3.4 3447,1314.69 3540.74,1220.94 3695,1220.94 3710.47,1220.94 3725.94,1220.94 3726.5,1220.94 v1(3749.42,1220.94) ; v1(3823,1294.53) J2.B6 3921,1294.53 3921,1255.16 J2.A6
  Bottom Layer w10: v1(3749.42,1220.94) v1(3823,1294.53)
VBUS: D9.A D10.1 J2.A4B9 J2.B4A9 R12.1 | length 1535
  Top Layer w10: R12.1 3385,1613 3544,1613 3632,1525 3632,1320 3652.31,1299.69 3695,1299.69 3710.75,1299.69 3726.5,1299.69 3753.69,1299.69 3813.49,1359.49 J2.B4A9 3906,1359.49 3910.52,1354.97 3960,1354.97 3989,1325.97 3989,1248.51 3918.49,1178 ; D9.A 3942,1055 3965.23,1078.23 3965.23,1152.77 3940,1178 3918.49,1178 ; J2.A4B9 3911,1170.51 3918.49,1178
VCC: C1.POS D2.A D3.A D9.C J1.1 | length 3903.7
  Top Layer w10: D3.A 1085,2370 1090,2365 C1.POS 1090,2259 1110,2259 1126,2243 1126,2134 1102,2110 1102,1961 1090,1949 J1.1 1136.57,1940 D2.A ; D9.C v1(3614,1055)
  Bottom Layer w10: J1.1 1256.49,1893.43 1612.46,1537.46 1612.46,1387.54 1621.5,1378.5 1821.5,1378.5 2145,1055 v1(3614,1055)
pads on no net: DS1.SH1 DS1.SH2 DS1.SH3 DS1.SH4 J2.41 J2.42 J2.A8 J2.B8 U1.5 U2.11 U2.12 U2.14 U2.15 U2.17 U2.18 U3.1 U3.2 U3.10 U3.12 U3.13 U3.14 U3.15 U3.16 U3.17 U3.18 U3.19 U3.20 U3.21 U3.22 U3.23 U3.24 U3.27 U4.11 U4.19 U4.22 U4.23 U4.24 U4.25 U4.26 U4.27 U4.28

## Keep-outs
Keep-Out Layer:
  the board outline again, w10

## Silkscreen, mask and mechanical layers (free items; w line width, h text height)
Top Overlay:
  text "Full" at 2149.39,3210 h60 r90
  text "Low" at 1109.39,3205 h60 r90
  text "RESET" at 3874.28,1645 h60 r90